# Altium PCB PCB1.PcbDoc (part 6 of 7)
Units mil, origin at the board's own origin, x right, y up, seen from the top; angles counter-clockwise.
Board outline 2100 x 2700 mil, 6 copper layers (Top Layer, Layer 2, Layer 3, Layer 4, Layer 5, Bottom Layer), stack 32.112 mil thick; 200 components, 319 nets, 1280 pads, 807 vias.
Unrouted connection lines stored in the file: 4.
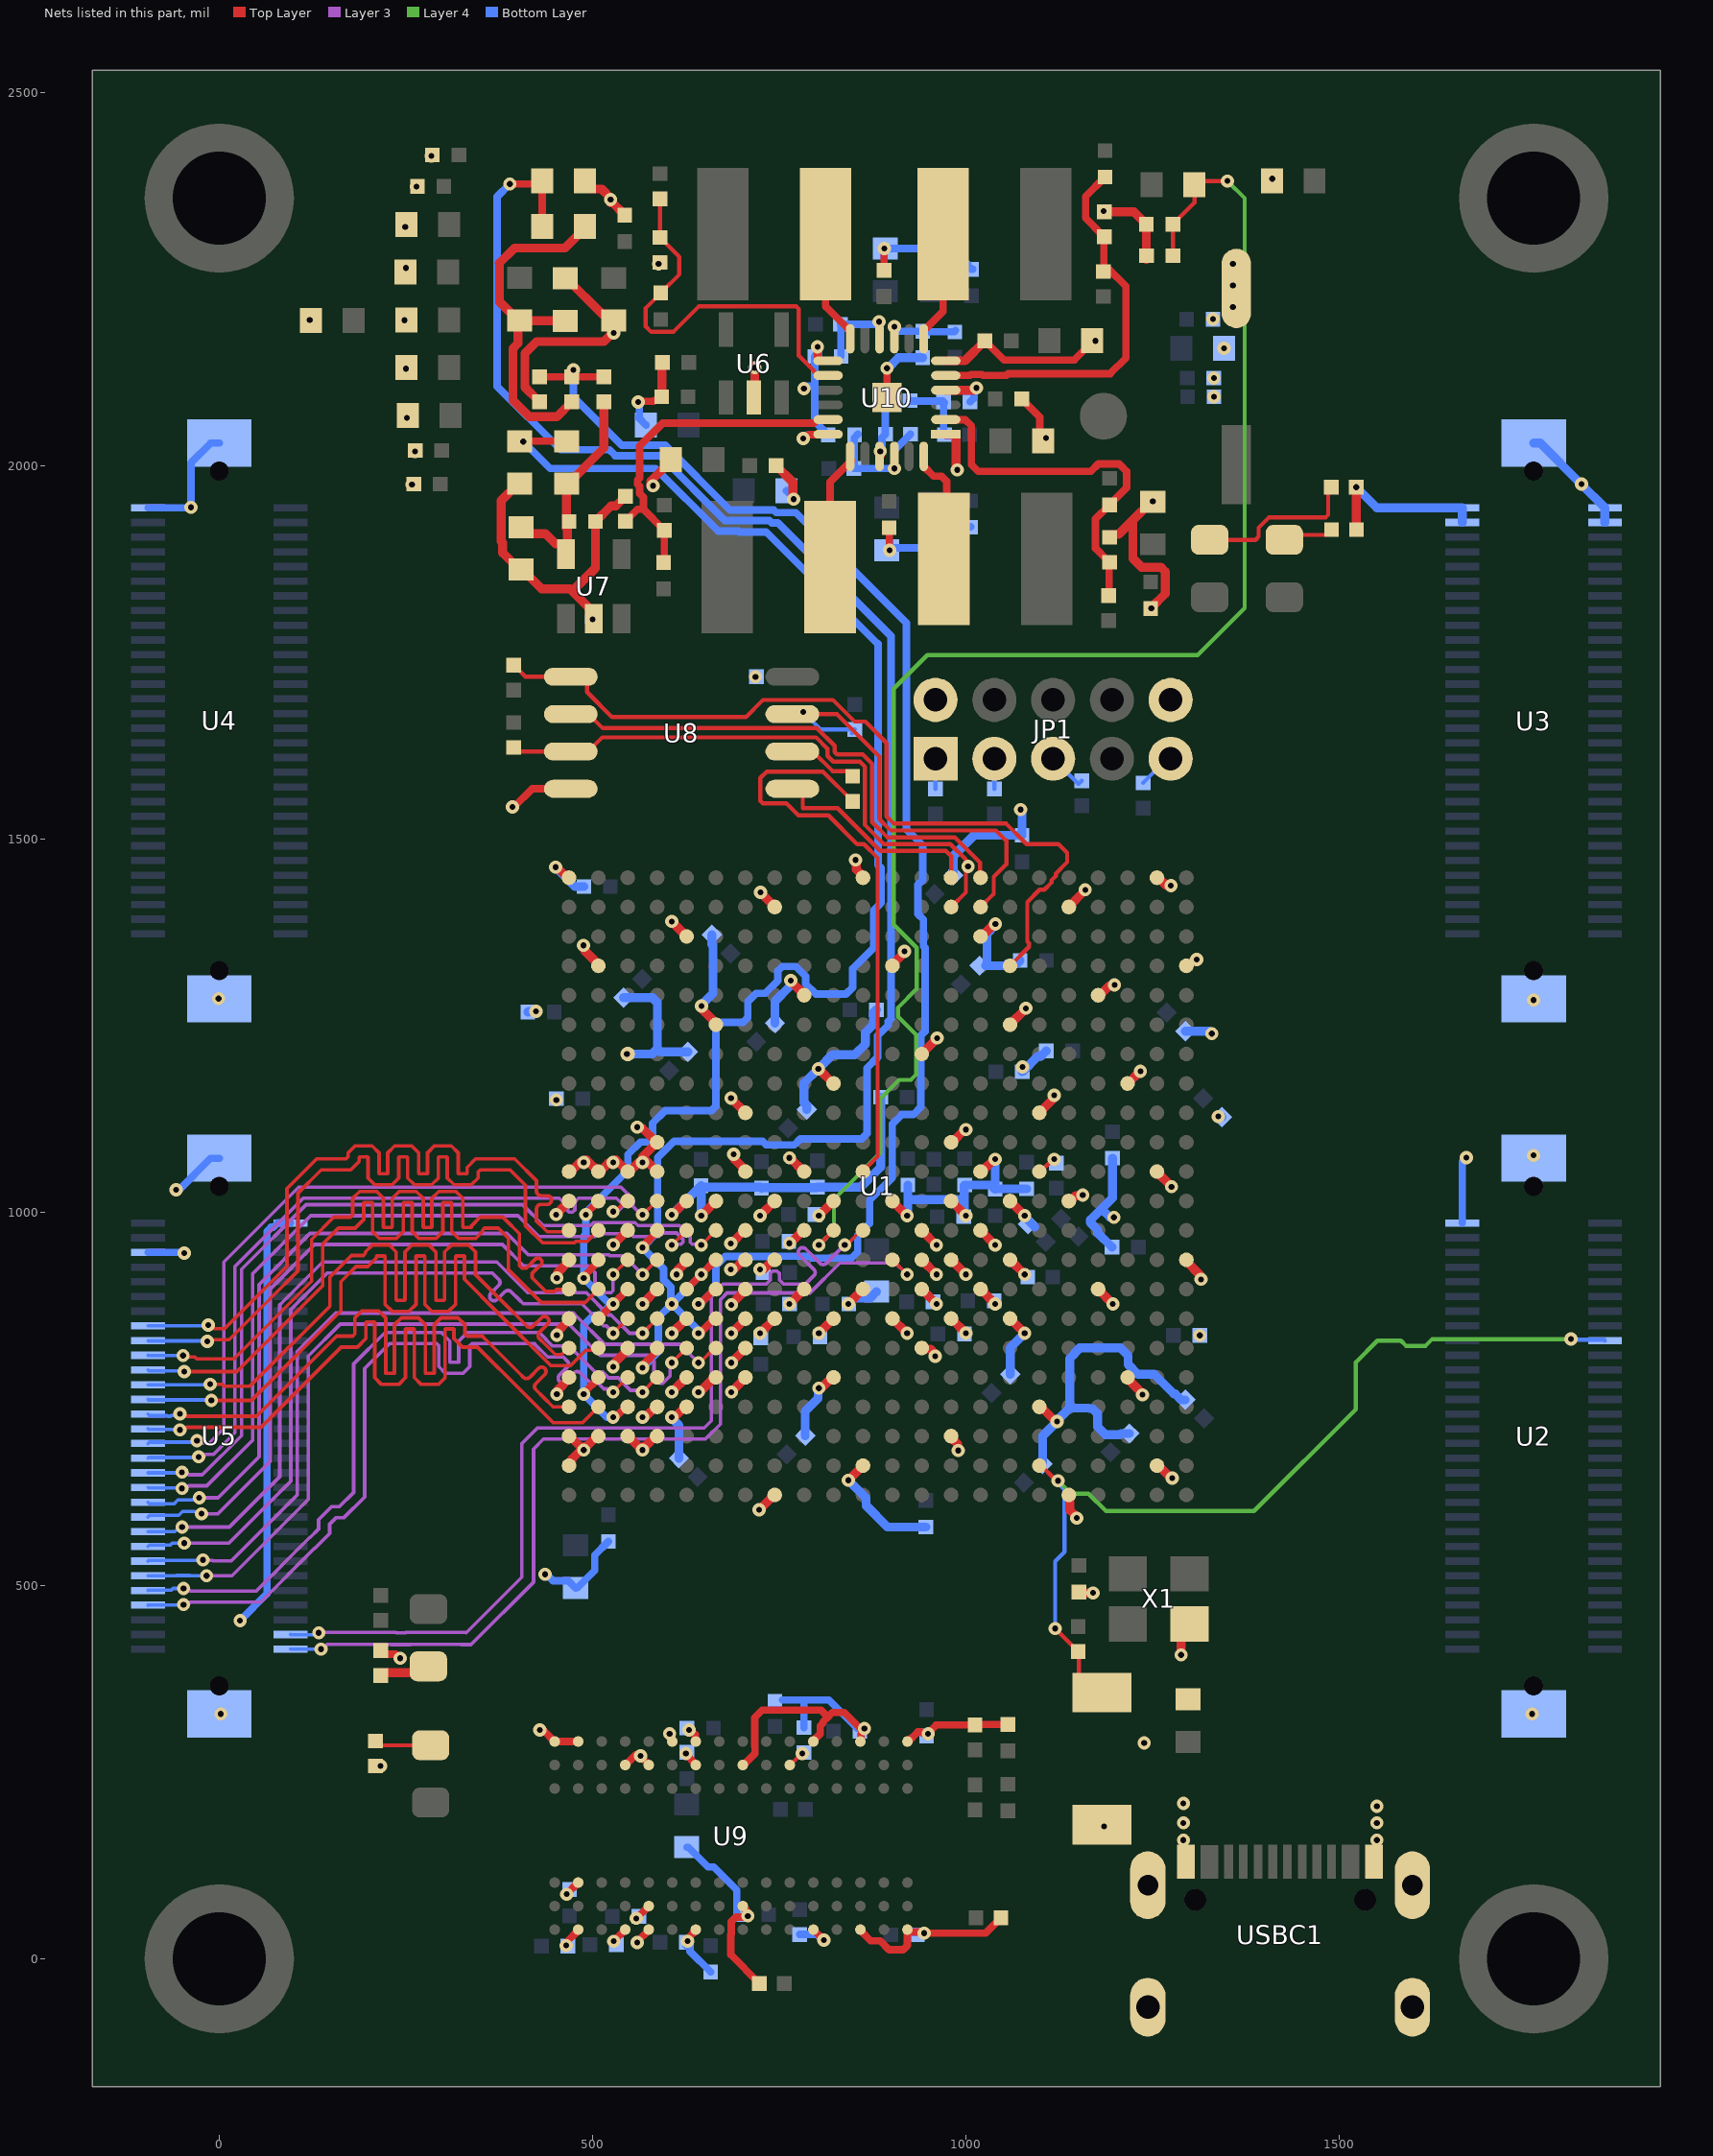
[diagram p10: the nets of this part, all layers, seen from the top]

## Via types
v1: diameter 17.7, hole 7.9, Top Layer to Bottom Layer, tented both sides, 807 vias

## Nets (pads, with @x,y where several pads share a name; then routed paths per layer and width w, separated by ;. In a path a pad name is that pad's centre, name@x,y a point inside that pad or via, vN(x,y) a via of type N, cw(c..) or ccw(c..) an arc to the next point about the centre after c; other vN are vias at no path point) (continued)
GND: C1.2 C2.2 C3.2 C4.2 C5.2 C6.2 C7.2 C8.2 C9.2 C10.2 C11.2 C12.2 C13.2 C14.2 C15.2 C16.2 C17.2 C18.2 C19.2 C20.2 C21.2 C22.2 C23.2 C24.2 C25.2 C26.2 C27.2 C28.2 C29.2 C30.2 C31.2 C32.2 C33.2 C34.2 C35.1 C36.1 C37.2 C38.1 C39.2 C40.2 C41.2 C42.2 C43.2 C44.2 C45.2 C46.2 C47.2 C48.2 C49.2 C50.2 C51.2 C52.2 C53.2 C54.2 C55.2 C56.2 C57.2 C58.2 C59.2 C60.2 C61.2 C62.2 C63.2 C64.2 C65.2 C66.2 C67.2 C68.2 C69.2 C70.2 C71.2 C72.2 C73.2 C74.2 C75.2 C76.1 C77.1 C78.1 C79.1 C80.1 C81.1 C82.1 C83.1 C84.1 C85.1 C86.1 C91.1 C92.1 C93.2 C94.2 C95.1 C98.1 C100.1 C102.1 C103.2 C104.2 C106.1 C107.1 C108.1 C109.2 C110.2 C112.1 C113.1 C114.1 C115.2 C116.2 C118.1 C119.1 C120.1 C121.2 C122.2 C124.1 E1.2 FB1.2 JP1.2 JP1.10 R1.1 R6.1 R7.1 R10.1 R11.1 R13.2 R24.2 R28.2 R29.2 R30.1 R31.2 R32.2 R35.2 R36.2 R39.2 R50.2 R57.1 R64.2 R66.2 SW1.1 U1.A2 U1.A3 U1.A5 U1.A7 U1.A9 U1.A11 U1.A12 U1.A22 U1.AA2 U1.AA12 U1.AA22 U1.AB9 U1.AB19 U1.B3 U1.B12 U1.B19 U1.C3 U1.C6 U1.C10 U1.C12 U1.C16 U1.D3 U1.D4 U1.D8 U1.D12 U1.D13 U1.E4 U1.E5 U1.E7 U1.E9 U1.E11 U1.E20 U1.F5 U1.F11 U1.F17 U1.G5 U1.G6 U1.G7 U1.G8 U1.G9 U1.G10 U1.G12 U1.G14 U1.H1 U1.H7 U1.H9 U1.H11 U1.H21 U1.J8 U1.J10 U1.J12 U1.J18 U1.K5 U1.K7 U1.K11 U1.K15 U1.L2 U1.L8 U1.L22 U1.M7 U1.M11 U1.M19 U1.N6 U1.N8 U1.N9 U1.N10 U1.N16 U1.P3 U1.P7 U1.P9 U1.P11 U1.P13 U1.R8 U1.R10 U1.R12 U1.R20 U1.T7 U1.T9 U1.T11 U1.T17 U1.U4 U1.U14 U1.V1 U1.V11 U1.V21 U1.W8 U1.W18 U1.Y5 U1.Y15 U2.59 U2.61 U2.62 U3.57 U3.58 U3.59 U3.60 U3.61 U3.62 U4.59 U4.61 U4.62 U5.55 U5.60 U5.61 U5.62 U6.2 U7.2 U8.4 U9.A9 U9.B1 U9.B3 U9.B9 U9.D1 U9.D8 U9.E1 U9.E2 U9.E8 U9.F9 U9.G1 U9.G8 U9.G9 U9.J2 U9.J8 U9.M1 U9.M9 U9.P1 U9.P9 U9.T1 U9.T9 U10.1 U10.4 U10.6 U10.13 U10.18 U10.25 USBC1.0 USBC1.A1 USBC1.A12 USBC1.B1 USBC1.B12 X1.2 | length 10959.2
  Top Layer w10: R13.2@216,412.73 220.84,407.89 236.03,407.89 241.48,402.44 v1(242.16,402.44) ; v1(392.68,1542.78) 394.76,1542.78 418.98,1567 U8.4@470.65,1567 ; v1(429.27,306.45) 430.74,304.98 435.03,304.98 447.66,292.35 U9.A9@449.02,290.99 476.99,290.99 U9.B9@478,292 ; v1(464.59,17.74) 466.06,19.21 466.06,23.43 480.53,37.89 U9.B1@480.53,39.02 ; v1(465,86.5) U9.B3@480.52,102.01 ; U9.B9@480.37,290.98 U9.B9@480.52,290.98 ; v1(527.99,23.5) U9.D1@543.52,39.02 ; v1(528,2177.65) C104.2@528,2194 ; U9.D8@543.51,259.49 543.76,259.49 557.63,273.36 v1@562.81,273.36 ; v1(558.44,54.12) 558.52,54.12 574.92,70.52 U9.E2@575,70.52 ; v1(559.45,21.88) 559.45,22.68 575.01,38.23 U9.E1@575.01,39.03 ; v1(561,2085.15) 561.85,2086 581.58,2086 582.74,2087.16 587.44,2087.16 C18.2@592.28,2092 ; v1(564.23,271.89) 566.34,269.78 566.34,268.98 575,260.31 U9.E8@575,259.5 ; v1(588.15,2270.15) R36.2@590,2272 ; v1(602.93,301.5) 602.93,299.42 605.7,296.65 605.7,291.78 U9.F9@606.5,290.99 ; v1(624.85,275.02) 624.85,273.78 638,260.62 U9.G8@638,259.49 ; v1(627.15,23.51) 628.63,24.98 628.63,28.52 638.01,37.89 U9.G1@638.01,39.02 ; v1(629.14,306.47) 630.96,306.47 637.2,300.24 637.2,291.78 U9.G9@638,290.98 ; U9.J2@700.99,70.51 700.99,69.38 706.14,64.23 706.14,58.78 v1(707.61,57.3) ; U9.J8@700.99,259.49 701.81,259.49 717.34,275.02 717.34,284.09 716.89,284.53 716.89,322.89 727,333 805.7,333 814.85,323.85 ; v1@707,56 706.83,55.83 691.83,55.83 685.41,49.41 685.41,32.9 685,32.49 685,5.27 R35.2@723.27,-33 ; v1(782,2036) 784.08,2036 789.52,2041.44 814.91,2041.44 U10.18@815.26,2041.79 ; U9.M1@795.49,39.02 v1(809.63,24.91) ; U9.M9@795.48,290.98 795.48,292.11 804.6,301.24 804.6,311.97 808.7,316.07 808.7,317.7 814.85,323.85 ; v1(801,2159) 801.13,2158.87 801.13,2141.05 801.97,2140.21 U10.13@815.26,2140.21 ; U9.P9@858.47,290.98 859.27,291.78 859.27,301.75 863.87,306.36 v1(863.87,308.44) ; U9.P1@858.48,39.02 858.48,37.89 872.37,24 884.93,24 896.93,12 915.61,12 921.47,17.86 U9.T1@921.47,35.86 ; v1@861,306 860.69,306 836.69,330 821,330 814.85,323.85 ; C98.1@890,2260 890.27,2260.27 890.27,2290.27 v1(890.54,2290.54) ; U10.25@894,2091 v1(894,2130.37) ; C114.1@897,1916 897.27,1915.73 897.27,1886.73 v1(897.54,1886.46) ; U9.T1@921.47,39.03 922.6,39.03 925.77,35.86 942.48,35.86 v1(943.95,34.38) 1026.11,34.38 1044.73,53 R24.2@1050,53 ; U9.T9@921.46,290.99 922.59,290.99 935.28,303.68 940,303.68 941.46,302.22 948.11,302.22 v1@948.66,301.67 ; v1@946,299 v1@948.67,301.67 ; v1(949.18,301.16) v1@948.67,301.67 ; R30.1@1017,313.89 1012.83,313.89 R30.1@1012,313.05 960.05,313.05 v1@948.67,301.67 ; R30.1@1017,314 1017.28,313.72 C100.1@1056,313.72 ; C109.2@1026,2163 1029,2163 1050.73,2141.27 1144.78,2141.27 1168.54,2165.03 C110.2@1168.54,2167 v1(1173,2167) ; C92.1@1075,2086 1077.43,2086 1098.7,2064.73 1098.7,2037.39 C91.1@1103.09,2033
  Top Layer w12: R66.2@209,258.27 v1(215.73,258.27) ; R7.1@402,1975.46 400.03,1975.46 377.27,1952.69 377.27,1898.64 379.39,1896.52 379.39,1883.1 402.03,1860.46 C37.2@404,1860.46 ; C37.2@405.97,1860.46 431.7,1834.72 469.73,1834.72 495.69,1808.76 495.69,1801.31 U7.2@501.9,1795.1 ; R1.1@429,2085.27 416.67,2097.6 416.31,2097.6 409.16,2104.75 409.16,2150.16 425,2166 514.8,2166 526.46,2177.65 v1(528,2177.65) ; v1(450.31,1462) 451.4,1460.91 453.16,1460.91 466.11,1447.96 U1.A22@468.19,1447.96 ; v1(450.89,996.74) 450.89,997.16 468.19,1014.46 U1.A11@468.19,1014.89 ; v1(451.96,756.26) 453.05,757.36 453.05,761.45 468.19,776.59 U1.A5@468.19,778.67 ; v1(451.96,835.4) 453.05,836.49 453.05,840.19 468.19,855.33 U1.A7@468.19,857.41 ; v1(451.96,911.92) 453.05,913.01 453.05,918.93 468.19,934.07 U1.A9@468.19,936.15 ; C74.2@463,2250.54 464.97,2250.54 512.75,2202.76 517.27,2202.76 C104.2@527,2193.03 ; U1.A2@468.19,660.56 468.19,662.64 471.74,666.19 471.74,669.04 487.87,685.17 488.96,686.26 491.81,686.26 505.48,699.93 U1.B3@507.56,699.93 ; U1.A3@468.19,699.93 469.21,699.93 v1(487.87,681.26) ; U1.A12@468.19,1054.26 470.27,1054.26 481.41,1065.4 486.78,1065.4 v1(487.87,1066.49) ; 474,1833 503.72,1862.72 C38.1@503.72,1925 524.53,1945.81 531.08,1945.81 R64.2@544,1958.73 ; v1(487.75,1357.25) 488.84,1356.16 488.84,1350.51 507.56,1331.78 U1.B19@507.56,1329.85 ; v1@491.6,1070.22 U1.B12@507.56,1054.26 509.64,1054.26 520.78,1065.4 526.15,1065.4 v1(527.24,1066.49) ; R6.1@492,2375 496.73,2370.27 512.17,2370.27 v1@525.22,2357.22 ; v1@524,2352 525.22,2353.22 C103.2@543,2335.43 ; v1(527.24,792.74) 528.33,793.83 528.33,797.36 546.93,815.96 U1.C6@546.93,818.04 ; v1(527.52,956.39) 527.66,956.39 546.79,975.52 U1.C10@546.93,975.52 ; v1@530.97,1070.22 U1.C12@546.93,1054.26 549.01,1054.26 560.15,1065.4 565.52,1065.4 v1(566.61,1066.49) ; v1(545.8,1211.74) U1.C16@546.93,1211.74 ; U1.C3@546.93,699.93 547.44,699.93 566.1,681.26 v1(566.61,681.26) ; v1(559.71,1113.74) 560.8,1112.64 566.48,1112.64 585.49,1093.63 U1.D13@586.3,1093.63 v1@566.61,1073.95 ; v1@566.61,685.17 567.7,686.26 570.55,686.26 584.22,699.93 U1.D3@586.3,699.93 ; v1(566.61,725.51) 567.7,726.6 571.52,726.6 584.22,739.3 U1.D4@586.3,739.3 ; v1(566.61,877.09) U1.D8@586.3,896.78 ; v1@569.34,1071.22 U1.D12@586.3,1054.26 ; v1(580.68,1972.94) 577.94,1972.94 577.84,1972.84 577.84,1979.42 604.46,2006.03 C122.2@604.46,2008 C122.2@604.46,2009.97 ; C18.2@592.28,2092 592.78,2092.5 592.78,2137.78 C17.2@596,2141 ; v1(605.73,1389.3) 605.73,1389.23 625.67,1369.29 U1.E20@625.67,1369.22 ; v1(605.98,725.51) 606.42,725.07 609.36,725.07 623.59,739.3 U1.E4@625.67,739.3 ; v1(605.98,758.98) U1.E5@625.67,778.67 ; v1(605.98,837.72) U1.E7@625.67,857.41 ; v1(605.98,996.74) 606.75,996.74 624.9,1014.89 U1.E11@625.67,1014.89 ; v1(612.35,916.46) 613.44,917.55 613.44,921.84 625.67,934.07 U1.E9@625.67,936.15 ; v1(641.49,758.98) 642.59,760.07 644.36,760.07 662.96,778.67 U1.F5@665.04,778.67 ; v1(645.35,995.2) U1.F11@665.04,1014.89 ; v1(645.85,1276.16) 646.94,1275.06 646.94,1271.29 665.04,1253.19 U1.F17@665.04,1251.11 ; v1(684.72,923.24) 685.81,924.33 690.51,924.33 702.33,936.15 U1.G9@704.41,936.15 ; v1(684.72,957.93) 685.77,957.93 703.36,975.52 U1.G10@704.41,975.52 ; v1(685.27,1152.69) 685.27,1152.42 704.41,1133.27 U1.G14@704.41,1133 ; v1(685.73,758.98) 685.73,759.49 704.41,778.16 U1.G5@704.41,778.67 ; v1(685.73,798.35) 685.73,798.86 704.41,817.53 U1.G6@704.41,818.04 ; v1(685.73,837.72) 685.73,838.23 704.41,856.9 U1.G7@704.41,857.41 ; v1(685.73,875.9) 685.73,877 704.41,895.68 U1.G8@704.41,896.78 ; v1(688.72,1077.65) 689.81,1076.56 689.81,1070.94 704.41,1056.34 U1.G12@704.41,1054.26 ; U6.2@715.81,2091.03 717,2092.22 v1(717,2131) ; v1(722.85,601.53) 723.48,601.53 743.14,621.19 U1.H1@743.78,621.19 ; v1(723.9,923.29) 724.99,924.38 729.93,924.38 741.7,936.15 U1.H9@743.78,936.15 ; v1(724.09,837.72) U1.H7@743.78,857.41 ; v1(724.09,995.2) U1.H11@743.78,1014.89 ; v1(724.69,1428.28) 724.69,1427.98 743.78,1408.89 U1.H21@743.78,1408.59 ; C121.2@745.72,2000 767.91,1977.81 767.91,1955.94 v1(769,1954.85) ; v1(763.46,877.09) U1.J8@783.15,896.78 ; v1(763.46,958.28) 764.69,958.28 781.93,975.52 U1.J10@783.15,975.52 ; v1(763.46,1072.7) 764.09,1072.7 782.53,1054.26 U1.J12@783.15,1054.26 ; v1(765.35,1310.26) 765.35,1309.27 783.15,1291.47 U1.J18@783.15,1290.48 ; v1(802.16,1191.92) 802.57,1191.92 822.11,1172.37 U1.K15@822.52,1172.37 ; v1(802.83,764.16) 803.92,765.25 807.02,765.25 820.44,778.67 U1.K5@822.52,778.67 ; v1(802.83,837.72) U1.K7@822.52,857.41 ; v1(802.83,995.2) U1.K11@822.52,1014.89 ; v1(842.15,640.87) U1.L2@861.89,660.56 ; v1(842.2,877.09) U1.L8@861.89,896.78 ; v1(851.79,1471.64) 852.88,1470.55 852.88,1459.05 861.89,1450.04 U1.L22@861.89,1447.96 ; U1.M7@901.26,857.41 v1(920.95,837.72) ; U1.M11@901.26,1014.89 v1(920.95,995.2) ; U1.M19@901.26,1329.85 901.26,1331.41 917.44,1347.59 v1(917.44,1349.13) ; U1.N6@940.63,818.04 942.1,816.57 952.32,816.57 957.64,811.25 957.64,807.94 v1(958.73,806.84) ; U1.N8@940.63,896.78 v1(960.32,877.09) ; U1.N9@940.63,936.15 v1(960.32,916.46) ; U1.N10@940.63,975.52 v1(960.32,955.83) ; U1.N16@940.63,1211.74 940.63,1212.13 961.27,1232.77 v1(961.27,1233.16) ; U10.1@972.74,2041.79 986.33,2041.79 986.43,2041.69 986.43,1995.57 v1(988,1994) ; U10.4@972.74,2100.84 1010.84,2100.84 v1(1014,2104) ; U10.6@972.74,2140.21 972.83,2140.31 998.31,2140.31 C109.2@1025,2167 ; U1.P3@980,699.93 980,697.85 988.4,689.45 988.4,681.71 v1(989.49,680.62) ; U1.P7@980,857.41 v1(999.69,837.72) ; U1.P9@980,936.15 v1(999.69,916.46) ; U1.P11@980,1014.89 v1(999.69,995.2) ; U1.P13@980,1093.63 981.41,1093.63 998.28,1110.5 v1(999.69,1110.5) ; U1.R8@1019.37,896.78 v1(1039.06,877.09) ; U1.R10@1019.37,975.52 v1(1039.06,955.83) ; U1.R12@1019.37,1054.26 1020.93,1054.26 1037.51,1070.84 v1(1039.06,1070.84) ; U1.R20@1019.37,1369.22 1020.95,1369.22 1037.72,1385.99 v1(1039.27,1385.99) ; U1.T7@1058.74,857.41 v1(1078.43,837.72) ; U1.T9@1058.74,936.15 v1(1078.43,916.46) ; U1.T11@1058.74,1014.89 v1(1078.43,995.2) ; U1.T17@1058.74,1251.11 1058.74,1251.47 1079.9,1272.63 v1(1079.9,1272.99) ; U1.U4@1098.11,739.3 1100.19,739.3 1118.79,720.7 1120.75,720.7 v1(1121.85,719.61) ; U1.U14@1098.11,1133 1100.62,1135.51 1116.71,1151.6 1116.71,1155.41 v1(1117.8,1156.51) ; C91.1@1103.09,2033 v1(1107.09,2037) ; U1.V1@1137.48,621.19 1138.95,619.72 1138.95,600.87 1148.08,591.75 v1(1148.08,590.21) ; U1.V11@1137.48,1014.89 1139.56,1014.89 1146.48,1021.81 1155.06,1021.81 v1(1156.15,1022.9) ; U1.V21@1137.48,1408.59 1137.48,1409.14 1159.52,1431.18 v1(1159.52,1431.74) ; C35.1@1151,491.28 1152.28,490 v1(1170,490) ; U1.W18@1176.85,1290.48 1178.93,1290.48 1191.49,1303.04 1197.63,1303.04 v1(1198.72,1304.13) ; U1.W8@1176.85,896.78 v1(1196.54,877.16) ; v1(1184,2340.73) R39.2@1185,2339.73 1224.54,2339.73 C94.2@1241.35,2322.92 ; R50.2@1194,1903 1194,1905.73 1195.84,1907.57 1204.06,1907.57 1223.27,1926.78 ; U1.Y5@1216.22,778.67 1216.22,776.74 1236.07,756.89 v1(1236.07,755.35) ; U1.Y15@1216.22,1172.37 1216.63,1172.37 1233,1188.74 v1(1233.41,1188.74) ; C93.2@1241,2276 1241.35,2276.35 C94.2@1241.35,2322.92 ; C94.2@1242,2322 1242,2322.27 C94.2@1241.35,2322.92 ; v1(1248,1808.57) C115.2@1247,1808.57 1266.84,1828.41 1266.84,1857.98 1260.98,1863.84 1234.98,1863.84 1223.27,1875.55 1223.27,1926.78 ; v1(1250,1952) C116.2@1250,1951.54 1248.03,1951.54 1223.27,1926.78 ; U1.AA2@1255.59,660.56 1257.56,660.56 1274.38,643.74 v1(1275.92,643.74) ; U1.AA12@1255.59,1054.26 1255.59,1053.83 1275,1034.43 v1(1275,1034) ; U1.AA22@1255.59,1447.96 1257.67,1447.96 1268.39,1437.24 v1(1274.3,1437.24) ; v1(1288,407) 1288,437.2 X1.2@1299.34,448.54 ; U1.AB9@1294.96,936.15 1294.96,934.07 1313.44,915.59 1313.44,911.05 v1(1314.53,909.96) ; U1.AB19@1294.96,1329.85 1297.04,1329.85 1304.57,1337.38 1307.78,1337.38 v1(1308.87,1338.47) ; v1@1335.02,1128.02 v1(1337.88,1128.02) ; v1(1522.46,1971) 1522.6,1970.87 1522.6,1914.13 R32.2@1522.73,1914
  Layer 3 w12: v1@578.74,1971 v1(580.68,1972.94)
  Bottom Layer w10: U5.55@-95.46,946.05 -48.05,946.05 v1(-47,945) ; U4.59@-95.46,1943.42 -38.58,1943.42 v1(-38,1944) -38,2003.55 -11.5,2030.05 U4.62@0,2030.05 ; v1(-58,1030) -53.86,1030 -11.81,1072.05 U5.62@0,1072.05 ; v1(-1.05,1285.95) U4.61@0,1285.95 ; U5.61@0,327.95 v1(2.05,327.95) ; v1(27.76,452.98) 63.83,489.05 63.83,974.39 69.1,979.66 72.15,979.66 77.91,985.42 U5.60@95.47,985.42 ; v1(436.08,515.01) 438.17,515.01 446.96,506.22 467.24,506.22 C25.2@477,496.46 ; C25.2@477,497 479.51,497 502.73,520.22 502.73,540.73 C28.2@521,559 ; v1(561,2085.15) 562.47,2083.68 562.47,2064.54 561.69,2063.76 C39.2@571.46,2054 ; C79.1@625,18 629.43,18 630.28,17.16 630.28,10.01 C113.1@658,-17.72 ; C75.2@626,149.46 627.97,149.46 654.43,123 662,123 693,92 C84.1@693,55 ; v1(718,1717) C59.2@719.28,1717 ; 754,346.46 816.25,346.46 854.72,308 C78.1@862,308 ; C45.2@759.54,1966 769,1956.54 v1(769,1954.85) ; R28.2@777,32.54 800.21,32.54 809.75,23 v1@812,23 ; v1(782,2036) 787,2041 C120.1@815.28,2041 797.28,2059 797.28,2106.59 ; v1(782.85,2103.02) 783.02,2103.02 786.59,2106.59 797.28,2106.59 ; R57.1@783,309.73 783,344 785,346 ; v1(801,2159) 799.53,2157.53 799.53,2148.24 C118.1@797.28,2146 797.28,2106.59 ; v1(890.54,2290.54) C95.1@892,2290.54 ; C95.1@893,2292 894.46,2290.54 C102.1@955,2290.54 981.46,2290.54 1002.16,2269.84 1002.16,2267.56 1006.72,2263 C106.1@1009,2263 ; v1(897.54,1886.46) C112.1@894,1886.46 897.23,1889.69 954.69,1889.69 C107.1@955,1890 ; C107.1@953,1892.91 954.97,1892.91 980.06,1918 C108.1@1006,1918 ; C124.1@1005.39,2085.19 1010.24,2090.03 1010.24,2098.15 1014,2101.92 v1(1014,2104) ; U2.59@1664.54,985.42 1664.54,1067.54 v1(1670,1073) ; U2.62@1760,1072.05 v1(1760,1076) ; v1(1760,1284) U3.61@1760,1285.95
  Bottom Layer w12: C48.2@413,1268 414,1269 v1(424,1269) ; v1(450.31,1462) 476.31,1436 C50.2@488.28,1436 ; v1(451.28,1150.28) C49.2@451.28,1152 ; v1(499.72,1793.71) C36.1@499.72,1798 ; C46.2@541.47,1287.47 579.47,1287.47 586.5,1280.44 586.5,1218.77 ; v1(545.8,1211.74) 579.47,1211.74 586.5,1218.77 ; v1(605.98,725.51) 605.98,723.96 615.47,714.47 C29.2@615.47,670.53 ; v1(605.98,996.74) 606.45,996.74 C70.2@645,1035.28 C70.2@645.18,1035.11 ; C47.2@627.53,1214.53 590.75,1214.53 586.5,1218.77 ; v1(645.35,995.2) 645.18,995.38 C70.2@645.18,1035.11 ; v1(645.85,1276.16) 645.85,1277.7 661.11,1292.96 661.11,1357.14 659.47,1358.77 C43.2@659.47,1371.53 ; C44.2@744,1253 744,1282.43 764.26,1302.69 764.26,1309.16 v1(765.35,1310.26) ; C26.2@784.53,700.53 784.53,733.53 801.74,750.74 801.74,763.06 v1(802.83,764.16) ; C40.2@786.53,1137.53 786.53,1142.96 783,1146.49 783,1172.75 v1(802.16,1191.92) 821.25,1211 851,1211 865,1225 865,1240.51 875.87,1251.38 875.87,1267.16 C42.2@879.72,1271 ; v1(842.15,640.87) 866,617.03 866,607 894.72,578.28 C27.2@946,578.28 ; v1(842.2,877.09) 843.09,877.09 850.69,884.69 871.24,884.69 FB1.2@880,893.46 ; C23.2@885.57,1154 885.57,1060.57 858.28,1033.28 C65.2@801,1033.28 800.36,1032.64 726.64,1032.64 C66.2@726,1032 724.36,1033.64 646.64,1033.64 C70.2@645.18,1035.11 ; v1(894,2130.37) 895.54,2130.37 909.45,2144.28 C119.1@942,2144.28 ; v1@920,996 920.16,996 922,997.84 922,1017.06 ; C68.2@922,1036.28 922,1017.06 ; C41.2@983,1451 983,1477 1010.72,1504.72 C20.2@1075,1504.72 1075,1535.63 1072.94,1537.69 v1(1072.94,1539.23) ; v1(999.69,995.2) 997.36,997.53 997.36,1016.59 ; C64.2@1039,1034.53 C64.2@1039,1030.72 1033.43,1036.28 C67.2@998,1036.28 997.36,1035.64 997.36,1016.59 ; C64.2@1039.03,1034.56 v1@1039.03,1068.21 ; v1@1039.06,1068.24 v1(1039.06,1070.84) ; v1(1039.27,1385.99) 1039.27,1384.45 1028,1373.19 1028,1332 1026,1330 1052.72,1330 1055.88,1333.16 1068.44,1333.16 C21.2@1072.28,1337 ; C64.2@1042,1031.28 C69.2@1081,1031.28 ; C5.2@1059,783 1059,818.3 v1(1078.43,837.72) ; v1(1075.43,1194.43) C22.2@1075.43,1188 1096.25,1208.81 1100.1,1208.81 C13.2@1107.28,1216 ; v1(1078.43,995.2) 1078.43,993.66 1092,980.09 R10.1@1092,980 ; C6.2@1102.53,662.53 1102.53,700.3 v1(1121.85,719.61) 1121.85,720.84 1138.67,737.67 ; C14.2@1195.28,953 1176.15,972.13 1176.15,976.22 1166.66,985.71 1166.66,989.66 1181.33,1004.33 ; C12.2@1196,1072.28 1196,1019 1181.33,1004.33 ; 1197.41,701.89 1186.67,701.89 1176,712.56 1176,729.97 1168.97,737 1165.39,737 1164.72,737.67 1138.67,737.67 ; 1197.43,701.87 1205.93,701.87 1207.59,703.53 C4.2@1218.53,703.53 ; v1(1198,993) 1192.66,993 1181.33,1004.33 ; C3.2@1293.47,748.53 1288.04,748.53 1280.12,756.45 1278.32,756.45 1251.95,782.81 1230.19,782.81 1217,796 1217,808 1207,818 1152.03,818 1145,810.97 1145,810 1139,804 1139,738 1138.67,737.67 ; C16.2@1293.53,1242.47 1325.53,1242.47 v1(1329,1239) ; v1(1337.88,1128.02) 1342,1128 C15.2@1342.53,1127.47 ; v1(1522.46,1971) 1550.04,1943.42 U3.59@1664.54,1943.42 U3.57@1664.54,1923.74 ; v1(1758.05,327.95) U2.61@1760,327.95 ; U3.62@1760,2030.05 1768.84,2030.05 v1(1823.95,1974.95) U3.60@1855.47,1943.42 U3.58@1855.47,1923.74 ; 922,1017.06 922.47,1016.59 997.36,1016.59
  other v1: 1291,159 1550,159 1184.72,177.25 1291,182 1550,182 1550,204.15 1291,208 1238.46,289 1313,835 257.98,1974.58 261.98,2018.58 250.98,2063.58 1332,2092 1331.72,2117 249.98,2129.58 1345.54,2157 121,2195 247.98,2194.58 1330.72,2196 1357.35,2212 1357.35,2241 249.98,2264.58 1357.35,2270 248.98,2319.58 524,2356 263.98,2373.58 1410,2384 283.98,2414.58
MGT_CLK0_N: U1.E6 U5.11 | length 1047.3
  Top Layer w4.77: v1(605.98,798.35) U1.E6@625.67,818.04
  Layer 3 w4.77: v1(-17,513) 17,513 119.14,615.14 119.14,807.25 162.03,850.14 467.97,850.14 509.89,808.22 574,808.22 582,800.22 582,779 590.02,770.98 593.98,770.98 603.51,780.51 603.51,795.88 v1(605.98,798.35)
  Bottom Layer w4.77: U5.11@-95.47,512.98 -57.59,512.99 -57.32,513.26 -39.69,513.26 -39.42,512.99 v1(-17,513)
MGT_CLK0_P: U1.F6 U5.13 | length 1047.3
  Top Layer w4.77: v1(641.49,798.35) 643.42,798.35 663.11,818.04 U1.F6@665.04,818.04
  Layer 3 w4.77: v1(-21.85,534.15) -21.16,533.47 -9.07,533.47 -8.61,533 16.11,533 104.37,621.26 104.37,747.26 104.37,813.37 155.91,864.91 405,864.91 474.09,864.91 478.42,860.58 516.01,822.99 616.86,822.99 v1(641.49,798.35)
  Bottom Layer w4.77: U5.13@-95.47,532.67 -94.73,533.41 -22.59,533.41 v1(-21.85,534.15)
MGT_CLK1_N: U1.E10 U5.23 | length 1067.2
  Top Layer w4.77: v1(605.98,955.83) U1.E10@625.67,975.52
  Layer 3 w4.77: v1(-50,630) -47.53,632.47 -41.73,632.47 -40.74,633.47 -16.66,633.47 44.46,694.59 44.46,917.46 122.23,995.23 399.88,995.23 427.9,967.21 502.96,967.21 506.87,971.13 550.5,971.13 554.39,967.23 588.93,967.23 593.93,972.23 612.22,972.23 620.78,963.67 620.78,959.72 617.99,956.92 607.07,956.92 v1(605.98,955.83)
  Bottom Layer w4.77: U5.23@-95.46,631.09 -94.92,630.55 -50.55,630.55 v1(-50,630)
MGT_CLK1_P: U1.F10 U5.25 | length 1081.2
  Top Layer w4.77: v1(645.35,955.83) U1.F10@665.04,975.52
  Layer 3 w4.77: v1(-50,651.7) -47.53,649.23 -41.73,649.23 -40.74,648.24 -22.78,648.24 29.69,700.71 29.69,923.58 116.11,1010 406,1010 434.02,981.98 496.84,981.98 500.75,985.9 556.61,985.9 560.51,982 616.27,982 630.55,967.71 630.55,959.72 633.35,956.92 644.26,956.92 v1(645.35,955.83)
  Bottom Layer w4.77: U5.25@-95.46,650.78 -50.92,650.78 v1(-50,651.7)
MGT_RX_N_0: U1.A8 U5.41 | length 1034.1
  Top Layer w4.77: v1(-48.63,807.96) -46.51,805.83 -32.63,805.83 -30.24,803.44 19.56,803.44 123.56,907.44 123.56,963.56 153.33,993.33 169,993.33 175.71,993.33 178.51,996.12 178.51,1018.55 187.75,1027.79 210.58,1027.79 219.82,1018.55 219.82,980.12 220.4,979.53 231,979.53 231.59,980.12 231.59,1018.55 240.83,1027.79 263.66,1027.79 272.9,1018.55 272.9,980.12 273.48,979.53 284.08,979.53 284.67,980.12 284.67,1018.55 293.91,1027.79 316.74,1027.79 325.98,1018.55 325.98,980.12 326.56,979.53 337.16,979.53 337.75,980.12 337.75,981.88 349.19,993.33 379.56,993.33 382.21,990.68 401.77,971.12 401.77,928.23 405,925 411,925 424,938 429,938 432.02,934.98 432.02,931.02 419,918 419,912 437.23,893.77 448.81,893.77 451.19,896.16 467.56,896.16 U1.A8@468.19,896.78
  Bottom Layer w4.77: U5.41@-95.46,808.26 -95.31,808.11 -48.78,808.11 v1(-48.63,807.96)
MGT_RX_N_1: U1.C11 U5.27 | length 982.9
  Top Layer w4.77: v1(527.24,1000.63) 529.96,1000.63 544.22,1014.89 U1.C11@546.93,1014.89
  Layer 3 w4.77: v1(-27.77,672.23) -25.3,674.7 -19.45,674.7 -18.51,675.64 -7.78,675.64 20.92,704.34 20.92,927.21 112.48,1018.77 405,1018.77 455.23,1018.77 465.62,1008.38 465.62,1002.79 468.42,1000 473.21,1000 476,1002.79 476,1014 480.77,1018.77 531.74,1018.77 539.54,1010.97 539.54,1007.01 535.63,1003.11 529.72,1003.11 v1(527.24,1000.63)
  Bottom Layer w4.77: U5.27@-95.46,670.46 -94.58,671.35 -28.65,671.35 v1(-27.77,672.23)
MGT_RX_N_2: U1.A10 U5.45 | length 1004.9
  Top Layer w4.77: v1(-14.97,848.68) -11.47,848.68 -6.79,844 7.14,844 62.37,899.23 90.57,927.43 90.57,1031.57 130.33,1071.33 163,1071.33 169.71,1071.33 172.51,1074.12 172.51,1079.34 181.75,1088.58 204.58,1088.58 213.82,1079.34 213.82,1051.91 214.4,1051.33 225,1051.33 225.59,1051.91 225.59,1079.34 234.83,1088.58 257.66,1088.58 266.9,1079.34 266.9,1051.91 267.48,1051.33 278.08,1051.33 278.67,1051.91 278.67,1079.34 287.91,1088.58 310.74,1088.58 319.98,1079.34 319.98,1051.91 320.56,1051.33 331.16,1051.33 331.75,1051.91 331.75,1059.88 343.19,1071.33 369.92,1071.33 395.56,1071.33 424.77,1042.12 424.77,1030.35 424.77,1027.96 ccw(c430.66,1027.96) 430.66,1022.08 438.89,1022.08 cw(c438.89,1016.19) 438.89,1010.31 430.66,1010.31 ccw(c430.66,1004.42) 424.77,1004.42 424.77,988 436.54,976.23 439,973.77 466.44,973.77 U1.A10@468.19,975.52
  Bottom Layer w4.77: U5.45@-95.46,847.63 -95.28,847.81 -15.19,847.81 -15,848 v1@-15,848.64
MGT_RX_N_3: U1.C9 U5.19 | length 991.5
  Top Layer w4.77: v1(527.24,916.46) U1.C9@546.93,936.15
  Layer 3 w4.77: v1(-24,595.99) -2.01,595.99 64.07,662.07 64.07,662.39 68,666.33 68,897 127.6,956.6 379.16,956.6 407.71,928.06 493.94,928.06 503,919 503,897 508,892 524.45,892 527.24,894.79 v1(527.24,916.46)
  Bottom Layer w4.77: U5.19@-95.47,591.72 -93.29,593.9 -54.4,593.9 -49.22,599.09 -33.26,599.09
MGT_RX_P_0: U1.B8 U5.39 | length 1036.5
  Top Layer w4.77: v1(-47,786.32) 23.32,786.32 138.33,901.33 138.33,957.44 159.44,978.56 169,978.56 181.83,978.56 193.28,990 193.28,1012.43 193.86,1013.02 204.46,1013.02 205.05,1012.43 205.05,974 214.29,964.76 237.12,964.76 246.36,974 246.36,1012.43 246.94,1013.02 257.54,1013.02 258.13,1012.43 258.13,974 267.37,964.76 290.2,964.76 299.44,974 299.44,1012.43 300.02,1013.02 310.62,1013.02 311.21,1012.43 311.21,974 320.45,964.76 343.28,964.76 352.52,974 352.52,975.76 355.31,978.56 373.44,978.56 382.21,969.79 387,965 387,923.46 386.77,923.23 431,879 489.78,879 U1.B8@507.56,896.78
  Bottom Layer w4.77: U5.39@-95.46,788.57 -94.34,787.44 -48.13,787.44 v1(-47,786.32)
MGT_RX_P_1: U1.D11 U5.29 | length 986
  Top Layer w4.77: v1(566.61,996.74) 567.38,996.74 585.53,1014.89 U1.D11@586.3,1014.89
  Layer 3 w4.77: v1(-29.9,693.83) -27.42,691.35 -21.58,691.35 -20.64,690.41 -13.89,690.41 6.15,710.46 6.15,933.33 106.36,1033.54 405,1033.54 537.86,1033.54 554.31,1017.08 554.31,1007.01 564.59,996.74 v1(566.61,996.74)
  Bottom Layer w4.77: U5.29@-95.46,690.15 -93.62,691.99 -31.74,691.99 v1(-29.9,693.83)
MGT_RX_P_2: U1.B10 U5.43 | length 1019.1
  Top Layer w4.77: v1(-16,827) -13.77,829.23 13.26,829.23 68.49,884.46 105.34,921.31 105.34,1025.45 136.44,1056.56 163,1056.56 175.83,1056.56 187.28,1068 187.28,1073.22 187.86,1073.81 198.46,1073.81 199.05,1073.22 199.05,1045.8 208.29,1036.56 231.12,1036.56 240.36,1045.8 240.36,1073.22 240.94,1073.81 251.54,1073.81 252.13,1073.22 252.13,1045.8 261.37,1036.56 284.2,1036.56 293.44,1045.8 293.44,1073.22 294.02,1073.81 304.62,1073.81 305.21,1073.22 305.21,1045.8 314.45,1036.56 337.28,1036.56 346.52,1045.8 346.52,1053.76 349.31,1056.56 369.92,1056.56 389.44,1056.56 410,1036 410,981.88 432.88,959 475.53,959 477.43,960.9 492.94,960.9 U1.B10@507.56,975.52
  Bottom Layer w4.77: U5.43@-95.46,827.94 -94.99,827.47 -16.47,827.47 v1(-16,827)
MGT_RX_P_3: U1.D9 U5.21 | length 998.7
  Top Layer w4.77: v1(566.61,916.46) U1.D9@586.3,936.15
  Layer 3 w4.77: v1(-26.82,617.51) -1.7,617.51 53.23,672.44 53.23,903.12 121.49,971.37 385.28,971.37 405,951.66 413.83,942.83 521.77,942.83 522.94,941.66 541.42,941.66 v1(566.61,916.46)
  Bottom Layer w4.77: U5.21@-95.47,611.4 -93.29,609.23 -60.75,609.23 -55.56,614.41 -36.08,614.41 -35.46,615.04 -29.3,615.04 v1(-26.82,617.51)
MGT_TX_N_0: U1.A4 U5.33 | length 1026.5
  Top Layer w4.77: v1(-52.73,730.02) -50.26,727.55 -44.46,727.55 -43.47,726.56 49.67,726.56 157.11,834 172,834 178.71,834 181.51,836.79 181.51,858.38 190.75,867.62 213.58,867.62 222.82,858.38 222.82,784.59 223.4,784 234,784 234.59,784.59 234.59,849.22 243.83,858.46 266.66,858.46 275.9,849.22 275.9,784.59 276.48,784 287.08,784 287.67,784.59 287.67,849.22 296.91,858.46 319.74,858.46 328.98,849.22 328.98,836.79 331.77,834 343.87,834 351.89,834 356.08,829.81 356.19,829.81 405,781 405.5,780.5 407.19,778.81 ccw(c411.35,782.97) 415.51,778.81 427.47,790.78 cw(c431.64,786.62) 435.8,790.78 cw(c431.64,786.62) 435.8,782.46 423.83,770.49 ccw(c427.99,766.33) 423.83,762.17 433.5,752.5 446.7,739.3 U1.A4@468.19,739.3
  Bottom Layer w4.77: U5.33@-95.46,729.52 -93.16,727.21 -69.63,727.21 -69.18,726.77 -65.23,726.77 -64.45,727.55 -55.2,727.55 v1(-52.73,730.02)
MGT_TX_N_1: U1.C5 U5.7 | length 1040.5
  Top Layer w4.77: v1(527.24,758.98) U1.C5@546.93,778.67
  Layer 3 w4.77: v1(-47.99,474.33) -45.51,476.81 -39.72,476.81 -38.73,477.8 55.41,477.8 127.27,549.65 127.77,549.65 147.76,569.65 147.76,582.01 156.69,590.93 166.93,590.93 194.5,618.5 194.5,790.5 228,824 258,824 291.25,824 294.05,821.21 294.05,793.24 303.29,784 326.12,784 335.36,793.24 335.36,821.21 338.15,824 361,824 422.45,824 422.45,823.18 439.74,805.9 455.4,805.9 460.63,805.9 465.94,800.58 cw(c461.78,796.42) 465.94,792.26 455.53,781.85 ccw(c459.7,777.69) 455.53,773.53 ccw(c459.7,777.69) 463.86,773.53 475.06,784.73 cw(c479.22,780.57) 483.38,784.73 491.06,777.06 497.11,771 507.25,771 515.02,763.23 519.5,763.23 523.74,758.98 v1(527.24,758.98)
  Bottom Layer w4.77: U5.7@-95.47,473.61 -95.11,473.97 -48.35,473.97 v1(-47.99,474.33)
MGT_TX_N_2: U1.A6 U5.37 | length 1067.6
  Top Layer w4.77: v1(-12.17,769.49) -12.03,769.35 3.84,769.35 6.22,766.97 41.08,766.97 148.06,873.94 148.06,913.06 177,942 186,942 192.71,942 195.51,944.79 195.51,946.75 204.75,955.99 227.58,955.99 236.82,946.75 236.82,882.59 237.4,882 248,882 248.59,882.59 248.59,946.75 257.83,955.99 280.66,955.99 289.9,946.75 289.9,882.59 290.48,882 301.08,882 301.67,882.59 301.67,946.75 310.91,955.99 333.74,955.99 342.98,946.75 342.98,916.18 379,880.16 410.14,849.02 411.83,847.33 ccw(c415.99,851.49) 420.15,847.33 431.32,858.5 cw(c435.48,854.34) 439.64,858.5 cw(c435.48,854.34) 439.64,850.18 428.47,839.01 ccw(c432.63,834.85) 428.47,830.69 437.08,822.08 449.99,809.17 457.94,809.17 466.81,818.04 U1.A6@468.19,818.04
  Bottom Layer w4.77: U5.37@-95.46,768.89 -12.78,768.89 v1(-12.17,769.49)
MGT_TX_N_3: U1.C7 U5.15 | length 1014
  Top Layer w4.77: v1(527.24,837.72) U1.C7@546.93,857.41
  Layer 3 w4.77: v1(-47,556.76) 12.76,556.76 95.6,639.6 95.6,869.6 144.56,918.56 362.56,918.56 365.56,918.56 374.07,910.05 cw(c369.9,905.89) 374.07,901.72 363.64,891.3 ccw(c367.8,887.14) 363.64,882.97 ccw(c367.8,887.14) 371.96,882.97 382.39,893.4 cw(c386.55,889.24) 390.71,893.4 402.06,882.06 406.88,877.23 485.38,877.23 515.02,847.59 518.43,847.59 527.24,838.77 v1(527.24,837.72)
  Bottom Layer w4.77: U5.15@-95.47,552.35 -93.57,554.25 -65.67,554.25 -63.16,556.76 v1(-47,556.76)
MGT_TX_P_0: U1.B4 U5.31 | length 1028.3
  Top Layer w4.77: v1(-52.73,708.32) -50.26,710.8 -44.46,710.8 -43.47,711.79 55.79,711.79 163.23,819.23 172,819.23 184.83,819.23 196.28,830.68 196.28,852.27 196.86,852.85 207.46,852.85 208.05,852.27 208.05,778.47 217.29,769.23 240.12,769.23 249.36,778.47 249.36,843.1 249.94,843.69 260.54,843.69 261.13,843.1 261.13,778.47 270.37,769.23 293.2,769.23 302.44,778.47 302.44,843.1 303.02,843.69 313.62,843.69 314.21,843.1 314.21,830.68 325.65,819.23 343.87,819.23 345.77,819.23 405,760 447,718 486.26,718 U1.B4@507.56,739.3
  Bottom Layer w4.77: U5.31@-95.47,709.83 -94.72,709.08 -53.48,709.08 v1(-52.73,708.32)
MGT_TX_P_1: U1.D5 U5.9 | length 1043.3
  Top Layer w4.77: v1(566.61,758.98) U1.D5@586.3,778.67
  Layer 3 w4.77: v1(-47.99,496.03) -45.51,493.56 -39.72,493.56 -38.73,492.57 49.3,492.57 121.15,564.42 121.65,564.42 132.99,575.76 132.99,588.13 150.57,605.7 160.82,605.7 179.73,624.62 179.73,796.62 221.88,838.77 258,838.77 297.37,838.77 308.82,827.32 308.82,799.36 309.4,798.77 320,798.77 320.59,799.36 320.59,827.32 332.03,838.77 361,838.77 428.57,838.77 437.22,830.12 437.22,829.3 445.86,820.67 468.33,820.67 503.23,785.77 513.37,785.77 521.14,778 534.1,778 550.64,761.46 564.14,761.46 v1(566.61,758.98)
  Bottom Layer w4.77: U5.9@-95.47,493.3 -95.12,493.65 -64.39,493.65 -62.01,496.03 v1(-47.99,496.03)
MGT_TX_P_2: U1.B6 U5.35 | length 1069.2
  Top Layer w4.77: v1(-10.59,747.85) 42.85,747.85 162.83,867.83 162.83,906.94 183.12,927.23 186,927.23 198.83,927.23 210.28,938.68 210.28,940.63 210.86,941.22 221.46,941.22 222.05,940.63 222.05,876.47 231.29,867.23 254.12,867.23 263.36,876.47 263.36,940.63 263.94,941.22 274.54,941.22 275.13,940.63 275.13,876.47 284.37,867.23 307.2,867.23 316.44,876.47 316.44,940.63 317.02,941.22 327.62,941.22 328.21,940.63 328.21,910.07 373.43,864.84 443.87,794.4 470.34,794.4 491.13,815.19 504.71,815.19 U1.B6@507.56,818.04
  Bottom Layer w4.77: U5.35@-95.46,749.2 -94.79,748.53 -11.26,748.53 v1(-10.59,747.85)
MGT_TX_P_3: U1.D7 U5.17 | length 1013.9
  Top Layer w4.77: v1(566.61,837.72) U1.D7@586.3,857.41
  Layer 3 w4.77: v1(-49.82,578.28) 13.39,578.28 80.83,645.72 80.83,875.72 85.16,880.04 138.44,933.33 371.67,933.33 413,892 491.5,892 521.14,862.36 524.54,862.36 549.18,837.72 v1(566.61,837.72)
  Bottom Layer w4.77: U5.17@-95.45,572.02 -59.58,572.02 -53.32,578.28 v1(-49.82,578.28)
MGTAVCC: C74.1 FB2.2 R2.1 R4.1 | length 487.8
  Top Layer w12: 375,2271 395.31,2291.31 462.82,2291.31 489.54,2318.03 R4.1@489.54,2320 ; 375.27,2270.45 375.27,2219.22 FB2.2@399,2195.49 ; C74.1@463,2193.46 462.5,2193.96 403.04,2193.96 400,2190.91 400,2163.63 393.16,2156.78 393.16,2087.28 415.02,2065.43 452.16,2065.43 R2.1@472,2085.27
MGTAVTT: C37.1 C38.2 R3.1 R5.1 U7.5 | length 323.6
  Top Layer w12: C37.1@400,1920 411.22,1908.78 436.65,1908.78 450.41,1895.02 458.29,1895.02 464.1,1889.21 U7.5@464.1,1884.1 ; U7.5@462,1882 U7.5@464.1,1884.1 ; R5.1@463,1971 463,1971.49 R5.1@465,1973.49 ; U7.5@464.1,1881.33 U7.5@464.1,1884.1 ; C38.2@465,1916 R5.1@465,1973.49 ; C38.2@468.28,1925 466.19,1922.91 466.19,1886.19 U7.5@464.1,1884.1 ; R3.1@515,2085.27 515,2023.49 R5.1@465,1973.49
NetC93_1: C93.1 C94.1 FB3.1 U1.K10 | length 2127.3
  Top Layer w5.61: v1(802.83,955.83) U1.K10@822.52,975.52 ; C94.1@1276.78,2322.92 1306,2352.14 FB3.1@1306,2376 ; C93.1@1277,2281 1277,2321 C94.1@1284,2328 ; FB3.1@1305.54,2376 1310.54,2381 v1(1350,2381)
  Layer 4 w5.61: v1(802.83,955.83) 823,976 823,1017 885,1079 885,1152 910,1177 926,1177 933,1184 933,1237.7 909,1261.7 909,1274 934,1299 934,1354 903.02,1384.98 903.02,1513 903.02,1701.02 948,1746 1310,1746 1373,1809 1373,2358 v1(1350,2381)
NetC105_2: C105.2 R34.1 R36.1 U10.14 | length 522
  Top Layer w5.61: R36.1@590,2305.46 616,2279.46 616,2256 593,2233 C105.2@593,2232 ; R34.1@590,2357.27 590,2310 R36.1@592,2308 ; C105.2@591,2231 571,2211 571,2186.26 578.34,2178.92 607.92,2178.92 642,2213 772.71,2213 776,2209.71 776,2147 797,2126 ; 796.5,2125.5 U10.14@803.01,2119
NetC111_2: C111.2 R37.1 R39.1 U10.5 | length 527
  Top Layer w10: U10.5@972.74,2120.53 1005.28,2120.53 1006.61,2121.85 1021.39,2121.85 1022.72,2120.53 1053.75,2120.53 1056.22,2123 1193,2123 1214,2144 1214,2240 R37.1@1191,2263 ; R39.1@1182,2303 1182,2309.27 1160,2331.27 1160,2360.28 C111.2@1186,2386.28 ; R37.1@1184.5,2263 1184.5,2305.5 R39.1@1185,2306
NetC117_2: C117.2 R46.1 R50.1 U10.2 | length 498.7
  Top Layer w10: U10.2@972.74,2061.47 973.09,2061.13 998.87,2061.13 1007,2053 1007,2001 1016,1992 1167,1992 1177,2002 1205.13,2002 1210.84,1996.29 1210.84,1996.16 1215,1992 1215,1970.28 1193.72,1949 C117.2@1193,1949 ; R50.1@1189,1873 1189,1873.27 1173.16,1889.11 1173.16,1928.44 C117.2@1192,1947.28 ; R46.1@1191,1825.73 1191.5,1826.23 1191.5,1872.5 R50.1@1192,1873
NetC118_2: C118.2 R48.1 U10.10 | length 121.2
  Top Layer w10: v1(883.31,2192.53) 884.34,2191.5 884.5,2191.5 884.5,2170.09 U10.10@884.16,2169.74
  Bottom Layer w10: C118.2@832.22,2146.78 832.22,2188.51 R48.1@831.73,2189 882,2189 884.42,2191.42 v1(883.31,2192.53)
NetC119_2: C119.2 R52.1 U10.9 | length 85.5
  Bottom Layer w10: v1(904,2186) 910.28,2179.72 C119.2@942,2179.72 942.49,2179.22 984.22,2179.22 R52.1@986,2181
NetC120_2: C120.2 R56.1 R65.2 U10.22 | length 159.6
  Top Layer w10: v1(904,1996) U10.22@906,1998
  Bottom Layer w10: C120.2@855,2042 850.22,2037.22 850.22,1996.49 R56.1@849.73,1996 v1(904,1996) ; v1@905,1997 904,1998 904,2020.54 R65.2@925.46,2042
NetC123_2: C123.2 R60.1 R64.1 U10.17 | length 470.2
  Top Layer w10: R64.1@544,1925.27 560,1941.27 568,1941.27 ; C123.2@595,1870 596,1871 R60.1@596,1913.27 568,1941.27 ; U10.17@815.26,2061.47 800.99,2061.47 796.21,2056.69 593.55,2056.69 562.84,2025.98 562.84,1983.09 559.99,1980.24 559.99,1975.15 562.84,1972.3 562.84,1962.6 568,1957.44 568,1941.27
NetC124_2: C124.2 R61.1 R68.1 | length 88.1
  Bottom Layer w10: R68.1@924.73,2087 925.64,2086.1 968.9,2086.1 C124.2@969.96,2085.04 ; C124.2@969.96,2085.19 C124.2@969.96,2085.04 ; R61.1@971,2045 969.96,2046.03 C124.2@969.96,2085.04 ; C124.2@971,2084 C124.2@969.96,2085.04
NetJP1_1: JP1.1 R19.2 | length 40.5
  Bottom Layer w5.61: R19.2@959,1566.73 JP1.1@959,1607.26
NetJP1_3: JP1.3 R20.2 | length 40.6
  Bottom Layer w5.61: JP1.3@1037.74,1607.26 1037.74,1566.99 R20.2@1038,1566.73
NetJP1_5: JP1.5 R22.2 | length 53.8
  Bottom Layer w5.61: JP1.5@1116.48,1607.26 1149.74,1574 1151.27,1574 R22.2@1155,1577.73
NetJP1_9: JP1.9 R23.2 | length 50.4
  Bottom Layer w5.61: R23.2@1237,1574.73 1269.53,1607.26 JP1.9@1273.96,1607.26
NetL1_2: L1.2 U10.12 | length 146.3
  Top Layer w10: L1.2@811.9,2310 811.9,2213 840.19,2184.71 841.92,2184.71 844,2182.63 U10.12@844,2178
NetL2_2: L2.2 U10.7 | length 148.3
  Top Layer w10: U10.7@943,2174 943,2182.82 944.05,2183.87 946.55,2183.87 969.1,2206.42 L2.2@969.1,2310
NetL3_2: L3.2 U10.24 | length 177.1
  Top Layer w10: U10.24@943.21,2012.26 943.21,1998.97 956.53,1985.65 966.93,1985.65 974,1978.58 L3.2@974,1854
NetL4_2: L4.2 U10.19 | length 153.6
  Top Layer w10: L4.2@817.9,1864 817.9,1977.9 U10.19@846,2006
NetLED1_2: LED1.2 R13.1 | length 78.3
  Top Layer w12: R13.1@216,379.27 219.84,383.11 273.11,383.11 LED1.2@287,397
NetLED2_2: LED2.2 R31.1 | length 221.8
  Top Layer w5.61: LED2.2@1326.12,1903.12 LED2.2@1326.12,1900.4 1387.4,1900.4 1391.7,1904.7 1391.7,1916.7 1405.65,1930.65 1481.65,1930.65 1484.93,1933.93 1484.93,1965.2 R31.1@1490.61,1970.88
NetLED3_2: LED3.2 R32.1 | length 86.4
  Top Layer w5.61: LED3.2@1426.12,1904.88 LED3.2@1426.12,1900.4 LED3.2@1432.68,1906.96 ; LED3.2@1428.36,1902.64 LED3.2@1432.68,1906.96 ; R32.1@1489.27,1914 1482.23,1906.96 LED3.2@1432.68,1906.96
  Top Layer w10: LED3.2@1425,1906 LED3.2@1430,1911
NetLED4_2: LED4.2 R66.1 | length 76.4
  Top Layer w5: R66.1@209,291.73 214.73,286 LED4.2@283,286
NetR1_2: R1.2 R2.2 R3.2 U1.F8 | length 1893.1
  Top Layer w10: R1.2@429,2118.73 R2.2@472,2118.73 ; R2.2@474,2118.73 514.73,2118.73 R3.2@517,2121 ; v1(641.49,877.09) 643.42,877.09 663.11,896.78 U1.F8@665.04,896.78
  Bottom Layer w10: v1(474,2128) 474,2092 538.86,2027.14 597.1,2027.14 683.97,1940.27 742.33,1940.27 745.6,1937 772,1937 920,1789 920,1513 942,1491 942,1445 935.53,1438.53 935.53,1399.3 943,1391.82 943,1356 945,1354 945,1242 939.34,1236.34 939.34,1140.64 929.37,1130.67 913.76,1130.67 901,1117.91 901,1046 871,1016 871,985.06 854.77,968.83 854.77,946.78 846.47,938.48 793.32,938.48 790.88,940.93 737.73,940.93 737.44,940.64 716.72,940.64 716.66,940.59 677.54,940.59 665,928.05 665,896.74 656.75,888.49 654.98,888.49 643.58,877.09 v1(641.49,877.09)
NetR4_2: R4.2 R6.2 U1.D6 U1.D10 U1.E8 U1.F7 U1.F9 | length 2619.8
  Top Layer w5.61: R6.2@432.46,2376.46 R6.2@439,2383
  Top Layer w10: v1(389,2377) 428.46,2377 R6.2@432.46,2381 ; R4.2@432.46,2318 R6.2@432.46,2376.46 ; v1(566.61,791.49) 566.61,794.77 586.3,814.45 U1.D6@586.3,818.04 ; v1(566.61,952.49) 566.61,954.16 586.3,973.85 U1.D10@586.3,975.52 ; U1.E8@625.67,896.78 v1(645.35,916.46) U1.F9@665.04,936.15 ; v1(641.49,837.72) 643.42,837.72 663.11,857.41 U1.F7@665.04,857.41
  Bottom Layer w10: v1(389,2377) 372,2360 372,2106 457,2021 522.27,2021 530.14,2013.14 589.9,2013.14 676.77,1926.27 736.53,1926.27 739.8,1923 748,1923 899.5,1771.5 899.5,1259.08 895.77,1255.35 895.77,1250.77 881.5,1236.5 881.5,1207.21 867.22,1192.94 867.22,1105.08 860.14,1098 778,1098 770.05,1090.05 732.52,1090.05 727.58,1095 609.09,1095 587,1072.91 587,972.88 v1(566.61,952.49) 595,924.11 595,909.28 604.51,899.77 604.51,878.57 v1(605.98,877.09) ; v1(566.61,791.49) 588,812.88 588,859.11 v1(605.98,877.09) ; v1(641.49,837.72) 640.02,839.2 640.02,843.06 v1(605.98,877.09) ; v1(645.35,916.46) v1(605.98,877.09)
NetR5_2: R5.2 R7.2 U1.B5 U1.B7 U1.B9 U1.B11 U1.C4 U1.C8 | length 2256.6
  Top Layer w5.61: v1(487.87,756.26) v1@487.87,757.62 ; v1(487.87,911.49) v1@487.87,913.98 ; U1.B5@507.56,777.31 U1.B5@507.56,778.67 ; U1.B9@507.56,933.67 U1.B9@507.56,936.15
  Top Layer w10: R7.2@407,2032.54 R5.2@465,2032.54 ; v1@487.87,757.62 U1.B5@507.56,777.31 ; v1@487.87,913.98 U1.B9@507.56,933.67 ; v1(490.73,996.72) 490.73,997.39 507.56,1014.22 U1.B11@507.56,1014.89 ; U1.B7@507.56,857.41 v1(527.24,877.09) U1.C8@546.93,896.78 ; v1(527.24,725.51) 528.72,726.98 531.99,726.98 544.31,739.3 U1.C4@546.93,739.3
  Bottom Layer w5.61: v1(487.87,756.26) v1@489.23,756.26
  Bottom Layer w10: v1(407,2032) 443,1996 584,1996 667.73,1912.27 695.27,1912.27 696.54,1911 732,1911 882,1761 882,1465 886,1461 886,1414 876,1404 876,1353.86 854.46,1332.33 854.33,1332.33 848,1326 848,1300.86 839.14,1292 799,1292 785,1306 785,1316 772,1329 753.86,1329 748,1323.14 748,1310 731,1293 719,1293 707.81,1281.8 707.81,1260.66 701.14,1254 673,1254 665,1246 665,1141.86 659.14,1136 597,1136 580,1119 580,1099.86 574.14,1094 564,1094 547,1077 547,1055.86 v1@487.87,996.74 ; v1(487.87,756.26) 487.87,848.87 500.48,861.48 509.54,861.48 525.16,877.09 v1(527.24,877.09) 525.77,878.57 520.8,878.57 v1(487.87,911.49) 487.87,967.87 490.73,970.73 v1(490.73,996.72) ; v1@489.23,756.26 489.23,754.91 518.93,725.21 526.95,725.21 v1(527.24,725.51)
NetR14_2: R14.2 U1.U12 | length 26.6
  Top Layer w5.61: U1.U12@1098.11,1054.26 1099.66,1054.26 1116.25,1070.84 v1(1117.8,1070.84)
NetR21_1: R21.1 U8.6 | length 92.9
  Top Layer w5.61: U8.6@767.35,1617 794.86,1617 821.09,1590.77 840.96,1590.77 845,1586.73 R21.1@845,1584
NetR57_2: R57.2 U9.L8 | length 22.9
  Top Layer w5.61: U9.L8@763.98,259.5 764.46,259.49 779.98,275.02 v1(780.47,275.02)
NetR65_1: R65.1 R68.2 U10.21 | length 77
  Top Layer w10: v1(885.09,2019) 886,2018.09 U10.21@886,2013
  Bottom Layer w10: v1(885.09,2019) 885.09,2021.08 887.16,2023.15 887.16,2037.16 R65.1@892,2042 891.63,2042.37 891.63,2084.63 R68.2@893,2086
QSPI_CLK: R21.2 U1.L12 | length 791.7
  Top Layer w5.61: R21.2@848,1550.27 808.27,1590 733,1590 724.54,1581.54 724.54,1550.9 727.83,1547.61 759.3,1547.61 775.52,1531.39 815.61,1531.39 854,1493 863.08,1493 881.52,1474.55 881.52,1074.52 U1.L12@861,1054
QSPI_CS: R17.1 U1.T19 U8.1 | length 1118
  Top Layer w5.61: R17.1@394,1732.73 409.73,1717 U8.1@470.65,1717 483.92,1717 492.41,1708.51 492.41,1696.59 526,1663 705,1663 728,1686 821.59,1686 850.59,1657 865,1657 893.48,1628.52 893.48,1530.29 903.44,1520.33 1053.67,1520.33 1081,1493 1123.65,1493 1135.39,1481.26 1135.39,1468.7 1120.09,1453.41 1120.09,1450.14 1114.26,1444.3 1114.26,1441.27 1104.8,1431.81 1098.5,1431.81 1081.96,1415.28 1081.96,1362.53 1084.37,1360.13 1084.37,1355.48 U1.T19@1058.74,1329.85
QSPI_D0: U1.P22 U8.5 | length 289.1
  Top Layer w5.61: U8.5@767.35,1567 772.85,1567 781.35,1558.51 781.35,1541 827.96,1541 885.07,1483.89 972.82,1483.89 980,1476.71 U1.P22@980,1447.96
QSPI_D1: U1.R22 U8.2 | length 688.1
  Top Layer w5.61: U8.2@484,1667 494.65,1667 513.46,1648.2 800.34,1648.2 824,1624.53 824,1616.29 827.29,1613 861.63,1613 874.26,1600.37 874.26,1522.33 894.48,1502.11 984.71,1502.11 1018.63,1468.19 1018.63,1448.7 U1.R22@1019.37,1447.96
QSPI_D2: R16.1 U1.P21 U8.3 | length 808.8
  Top Layer w5.61: R16.1@394,1622.27 399.27,1617 U8.3@470,1617 ; U8.3@470.65,1617 494,1617 512.81,1635.8 799.14,1635.8 814.39,1620.55 814.39,1611.06 822.06,1603.39 857.65,1603.39 864.65,1596.39 864.65,1518.35 890,1493 978.96,1493 999.69,1472.28 v1@999.69,1462.65 ; U1.P21@980,1408.59 999.69,1428.28 v1@999.69,1462.65 ; v1(1002.53,1462.85) 999.89,1462.85 v1@999.69,1462.65
QSPI_D3: R18.1 U1.R21 U8.7 | length 576.9
  Top Layer w5.61: U8.7@782,1667 827,1667 883.87,1610.13 883.87,1526.31 898.96,1511.22 1039.78,1511.22 1053,1498 ; U1.R21@1019.37,1408.59 1037,1426.22 1037,1449.06 1054,1466.06 1054,1498
  Bottom Layer w5.61: v1(782,1670) 805.73,1646.27 R18.1@851,1646.27 ; R18.1@847,1641 R18.1@850,1644
RESET: R8.1 SW1.2 U1.U2 U2.44 | length 1247.6
  Top Layer w5.61: U1.U2@1096.67,663 1098.05,663 1120.87,640.18 v1(1123.24,640.18) ; v1(1119.27,442.27) R8.1@1150,411.54 ; R8.1@1151,411 1151,380.36 1174.77,356.59 SW1.2@1182,356.59
  Layer 4 w5.61: v1(1123.24,640.18) 1140.42,623 1164,623 1187.39,599.61 1385.61,599.61 1522,736 1522,799 1550.7,827.7 1582.3,827.7 1589,821 1615.27,821 1624.27,830 v1(1810,830) v1@1812,830
  Bottom Layer w5.61: v1(1119.27,442.27) 1119.27,532.27 1132,545 1132,628.15 1123.24,636.91 v1(1123.24,640.18) ; v1(1810,830) 1811.03,828.97 1854.44,828.97 U2.44@1855.47,827.94
XADC_V_N: U1.M9 U5.2 | length 1277.3
  Top Layer w4.77: U1.M9@901.26,936.15 v1(920.95,916.46)
  Layer 3 w4.77: v1(136,414.76) 138.72,414.76 145.26,421.3 229.76,421.3 230.3,420.76 255.97,420.76 256.52,421.3 323.44,421.3 323.98,420.76 337.03,420.76 420.75,504.48 420.75,682.75 434,696 651,696 671,716 671,882.96 679.87,891.83 790.83,891.83 831,932 905.41,932 v1(920.95,916.46)
  Bottom Layer w4.77: U5.2@95.47,414.56 95.79,414.87 135.89,414.87 v1(136,414.76)
XADC_V_P: U1.L10 U5.4 | length 1287.2
  Top Layer w4.77: v1(837.42,956.15) 839.97,956.15 859.34,975.52 U1.L10@861.89,975.52
  Layer 3 w4.77: v1(133.12,436.51) 133.67,437.05 236.28,437.05 236.83,436.51 249.45,436.51 250,437.05 329.96,437.05 330.51,436.51 405,511 405,690 425.77,710.77 649.37,710.77 659,720.4 659,887.93 674.9,903.83 732.83,903.83 738,909 738,918.21 740.79,921 747,921 749.79,918.21 749.79,917.21 750,917 750,909 755.17,903.83 762.17,903.83 785.1,903.83 796.13,914.86 ccw(c791.97,919.02) 796.13,923.18 777,942.31 cw(c781.16,946.47) 777,950.63 cw(c781.16,946.47) 785.32,950.63 804.45,931.5 ccw(c808.61,935.67) 812.77,931.5 825.63,944.37 v1(837.42,956.15)
  Bottom Layer w4.77: U5.4@95.47,434.24 95.79,433.93 125.26,433.93 125.37,434.03 130.65,434.03 v1(133.12,436.51)
pads on no net: *1.1 *2.1 *3.1 *4.1 JP1.6 JP1.7 JP1.8 U1.AA9 U1.AA10 U1.AA11 U1.AA13 U1.AA14 U1.AA15 U1.AA16 U1.AB10 U1.AB11 U1.AB12 U1.AB13 U1.AB15 U1.AB16 U1.AB17 U1.E3 U1.G4 U1.T14 U1.T15 U1.T16 U1.U15 U1.U16 U1.V10 U1.V13 U1.V14 U1.V15 U1.W10 U1.W11 U1.W12 U1.W14 U1.W15 U1.W16 U1.Y11 U1.Y12 U1.Y13 U1.Y14 U1.Y16 U1.Y17 U2. U3. U4. U5. U6.4 U7.4 U9.J1 U9.J9 U9.L1 U9.L9 U9.M7 U9.T7 U10.15 U10.16 USBC1. USBC1.A5 USBC1.A6 USBC1.A7 USBC1.A8 USBC1.B5 USBC1.B6 USBC1.B7 USBC1.B8 X1.1

## Polygon pours and split planes (outlines as drawn)
GND on Bottom Layer "GND_L06_P012" (solid, remove dead copper, pour order 12): -173,2533 -172,2532 1931,2532 1931,-172 1929,-174 -174,-174 -174,2533
+5 on Bottom Layer "+5_L06_P003" (solid, remove dead copper, pour order 3): 1711.47,1967.53 1704,1960.05 1704,1837 1705,1837 1718,1824 1782,1824 1782,1828.34 1811.66,1858 1814.77,1854.89 1887.28,1854.89 1887.28,1905.72 1877,1916 1790,1916 1790,1932 1752,1970
+5 on Bottom Layer "+5_L06_P002" (solid, remove dead copper, pour order 2): 1647,415 1633,401 1633,251 1656,228 1719,228 1719,245 1736,262 1734.44,263.56 1734.44,414.56
GND on Top Layer "GND_L01_P009" (solid, remove dead copper, pour order 9): -173,2533 -172,2532 1931,2532 1931,-172 1929,-174 -174,-174 -174,2533
+5 on Top Layer "+5_L01_P000" (solid, remove dead copper, pour order 0): 1459,1953 1462,1956 1462,2088 1433,2117 1130,2117 1115,2102 1115,2026 1126,2015 1128,2017 1296,2017 1296,1989 1345,1940 1462,1940 1459,1943
GND on Layer 3 "GND_L03_P010" (solid, remove dead copper, pour order 10): -173,2533 -172,2532 1931,2532 1931,-172 1929,-174 -174,-174 -174,2533
+5 on Layer 3 "+5_L03_P001" (solid, remove dead copper, pour order 1): 662,2269 666,2265 1464,2265 1464,2262 1517,2209 1517,1862 1420,1765 654,1765 654,1773 636,1791 636,2239
GND on Layer 4 "GND_L04_P011" (solid, remove dead copper, pour order 11): -173,2533 -172,2532 1931,2532 1931,-172 1929,-174 -174,-174 -174,2533
+3.3_B on Layer 4 "+3.3_B_L04_P007" (solid, remove dead copper, pour order 7): 630,2215 646,2231 791,2231 837,2185 837,1964 791,1918 621,1918 587,1952 591,1956 591,2181
+3.3 on Layer 5 (split plane): 1909.9,-150.9 -149.9,-150.9 -149.9,2508.9 1909.9,2508.9
+1 on Layer 5 (split plane): 850.9,2215.11 804.89,2169.1 485,2169.1 483.05,2168.71 481.4,2167.6 404.4,2090.6 403.29,2088.95 402.9,2087 402.9,1234.87 402.29,1233.95 401.9,1232 402.29,1230.05 402.9,1229.13 402.9,1227 403.29,1225.05 404.4,1223.4 406.05,1222.29 408,1221.9 409.58,1222.22 587.9,1043.89 587.9,1032 588,1031.5 587.9,1031 588.29,1029.05 589.4,1027.4 591.05,1026.29 593,1025.9 960.89,1025.9 1011.4,975.4 1013.05,974.29 1015,973.9 1117.89,973.9 1140.9,950.89 1140.9,860.11 1109.89,829.1 406.87,829.1 405.95,829.71 404,830.1 402.05,829.71 401.13,829.1 306.11,829.1 285.1,850.11 285.1,2391.89 338.11,2444.9 850.9,2444.9
+1.5 on Layer 5 (split plane): 1511.9,1763.89 1511.9,442.11 1051.89,-17.9 344.11,-17.9 335.1,-8.89 335.1,371.89 407.6,444.4 408.71,446.05 409.1,448 409.1,818.9 1019.9,818.9 1019.9,475 1020.29,473.05 1021.4,471.4 1121.4,371.4 1123.05,370.29 1125,369.9 1180,369.9 1181.95,370.29 1183.6,371.4 1255.39,443.18 1255.95,443.29 1257.6,444.4 1321.6,508.4 1322.71,510.05 1323.1,512 1323.1,1426 1322.71,1427.95 1321.6,1429.6 1039.1,1712.11 1039.1,1853.89 1111.11,1925.9 1349.89,1925.9
+5 on Layer 5 (split plane): 1650.4,1936.4 1652.05,1935.29 1654,1934.9 1772.89,1934.9 1780.9,1926.89 1780.9,1834.11 1761.89,1815.1 1699,1815.1 1698,1814.9 1697,1815.1 1695.05,1814.71 1693.4,1813.6 1692.29,1811.95 1691.9,1810 1691.9,155.11 1640.89,104.1 1188.31,104.1 1520.6,436.4 1521.71,438.05 1522.1,440 1522.1,1750 1522.1,1766 1521.71,1767.95 1520.6,1769.6 1355.6,1934.6 1353.95,1935.71 1352,1936.1 1340.31,1936.1 1410.11,2005.9 1580.89,2005.9
+3.3_B on Layer 5 (split plane): 655.4,1870.6 654.29,1868.95 653.9,1867 653.9,1588 654.29,1586.05 655.4,1584.4 747.4,1492.4 749.05,1491.29 751,1490.9 957.89,1490.9 1034.05,1414.74 1034.05,1187.49 1034.13,1187.08 1030.11,1191.1 1028.46,1192.2 1026.51,1192.59 635.62,1192.59 543.1,1285.11 543.1,1401 542.71,1402.95 541.6,1404.6 539.95,1405.71 538,1406.1 536.05,1405.71 535.13,1405.1 510.11,1405.1 492.97,1422.24 492.97,1457.76 510.11,1474.9 541,1474.9 542.95,1475.29 544.6,1476.4 545.71,1478.05 546.1,1480 546.1,1898 545.71,1899.95 545.09,1900.88 707.11,2062.9 847.69,2062.9
+1.8 on Layer 5 (split plane): 1309.9,2092.11 1290.89,2073.1 705,2073.1 703.05,2072.71 701.4,2071.6 534.4,1904.6 533.29,1902.95 532.9,1901 533.29,1899.05 534.4,1897.4 535.9,1896.39 535.9,1485.1 508,1485.1 506.05,1484.71 504.4,1483.6 484.27,1463.48 483.16,1461.82 482.78,1459.87 482.78,1420.13 483.16,1418.18 484.27,1416.52 504.4,1396.4 506.05,1395.29 508,1394.9 532.9,1394.9 532.9,1283 533.29,1281.05 534.4,1279.4 629.9,1183.89 631.55,1182.79 633.51,1182.4 1024.39,1182.4 1079.9,1126.89 1079.9,989 1080.29,987.05 1081.4,985.4 1082.69,984.1 1017.11,984.1 966.6,1034.6 964.95,1035.71 963,1036.1 598.1,1036.1 598.1,1046 597.71,1047.95 596.6,1049.6 413.1,1233.11 413.1,2084.89 487.11,2158.9 807,2158.9 808.95,2159.29 810.6,2160.4 859.6,2209.4 860.71,2211.05 861.1,2213 861.1,2446.89 861.11,2446.9 1309.9,2446.9
GND on Layer 2 (split plane): 1909.9,-150.9 -149.9,-150.9 -149.9,2508.9 1909.9,2508.9